# Altium PCB Glucometer-I.C.- Full V1.2.PcbDoc
Units mm, origin at the board's own origin, x right, y up, seen from the top; angles counter-clockwise.
Board outline 35.25 x 28.25 mm, 2 copper layers (Top Layer, Bottom Layer); 29 components, 30 nets, 125 pads, 12 vias.
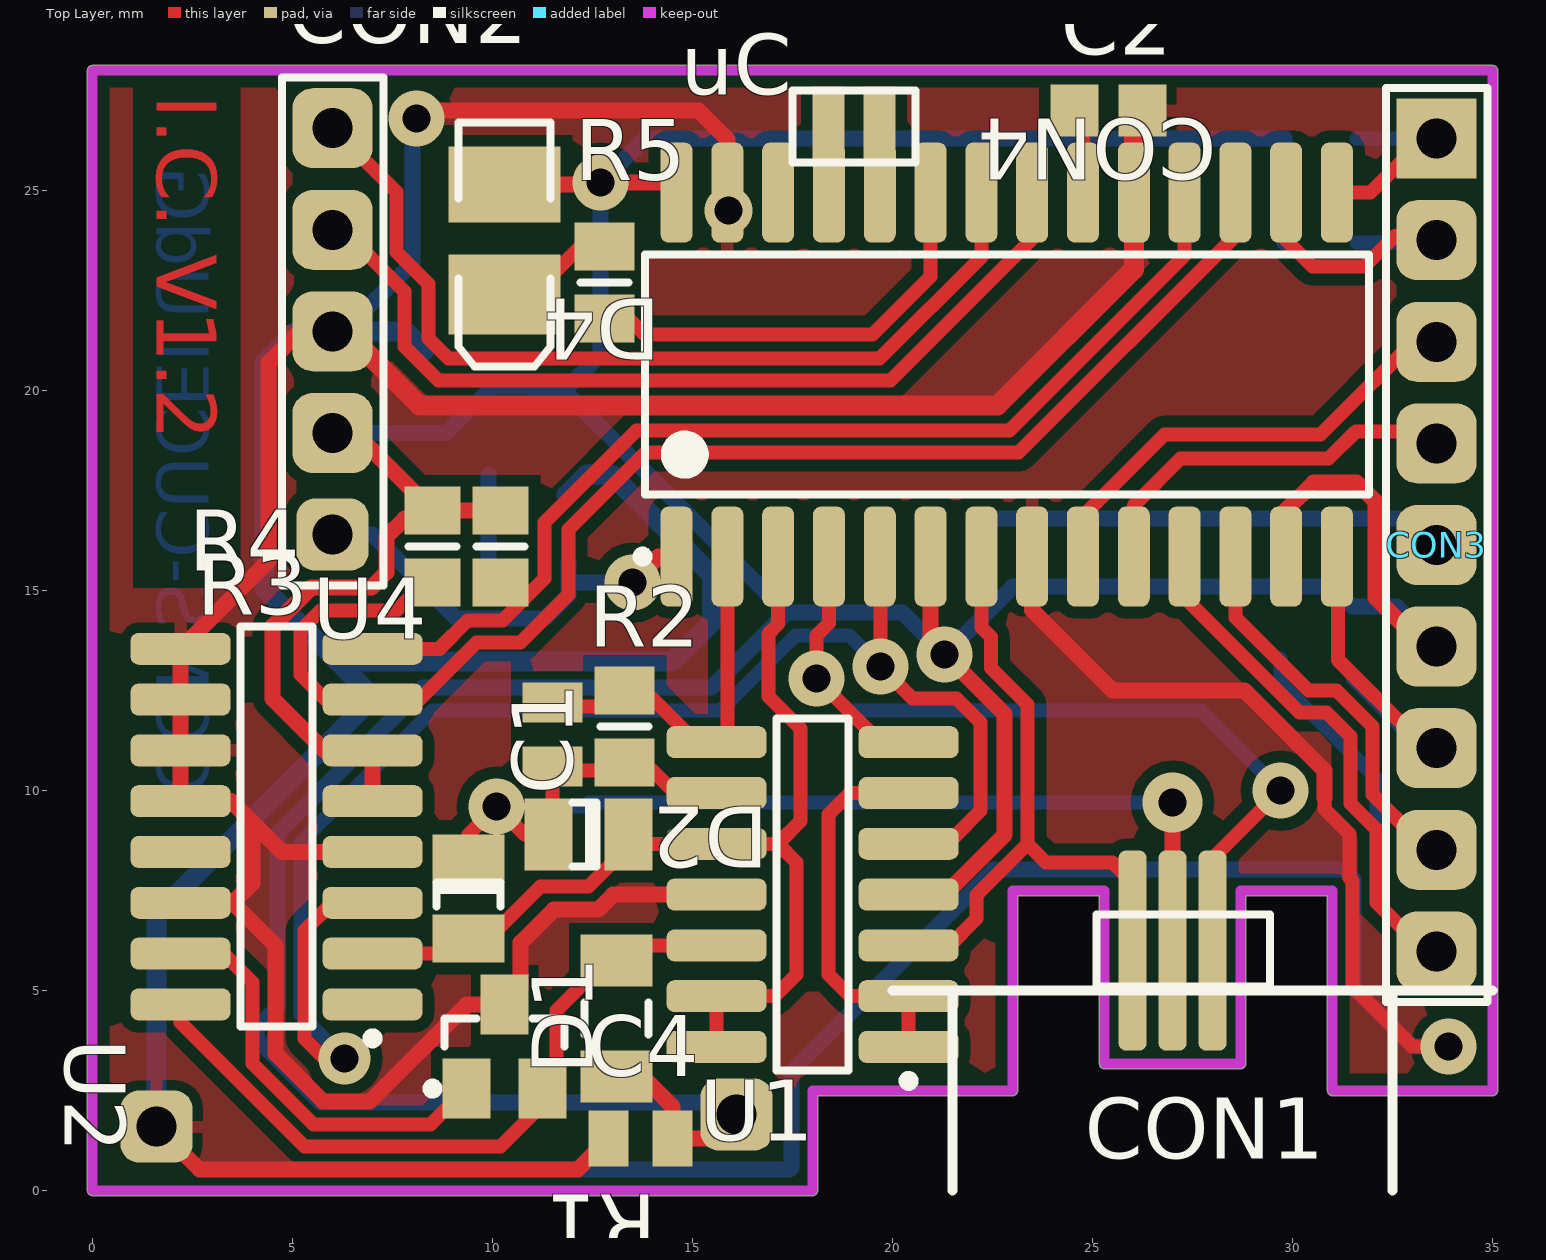
[diagram p0: Top Layer view]
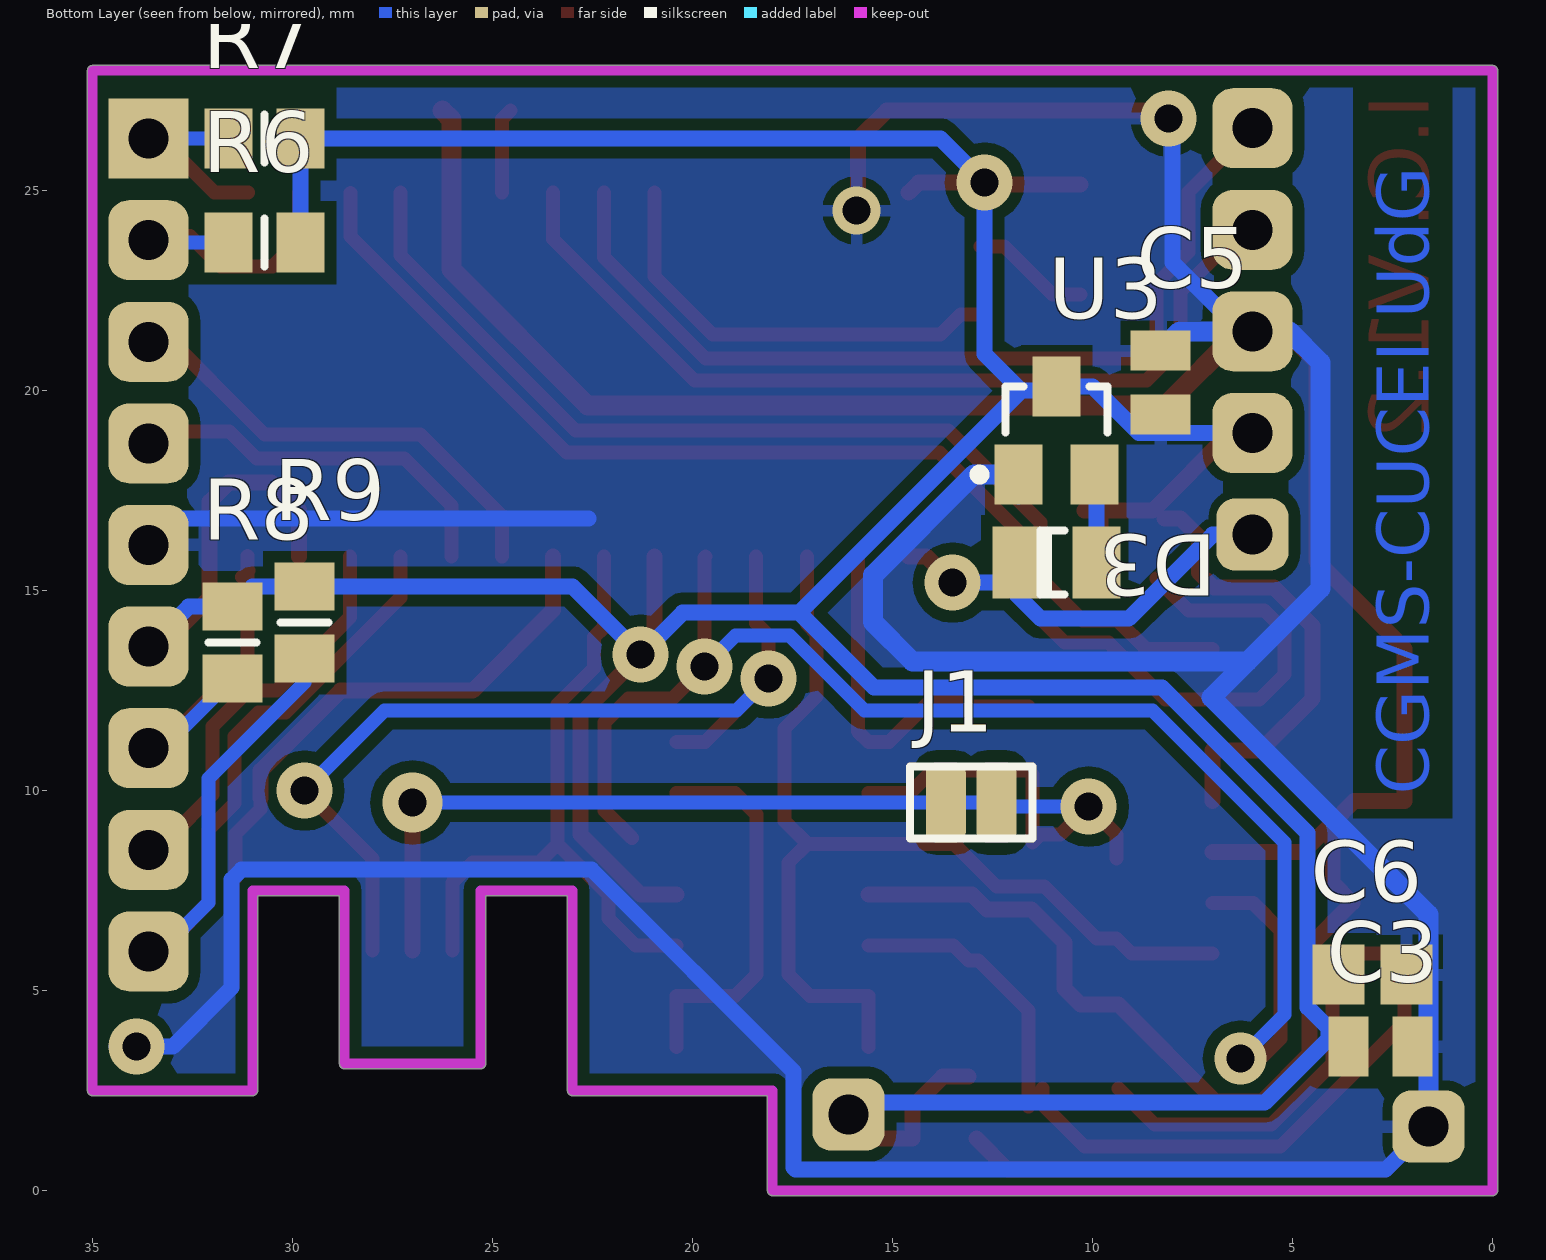
[diagram p1: Bottom Layer view, seen from below]

## Layer stack, top to bottom
Top Layer: signal copper 0.0356
Dielectric: dielectric 0.32, FR-4, Dk 4.8
Bottom Layer: signal copper 0.0356

## Board outline
-0.127,0 ccw(c0,0) 0,-0.127 18,-0.127 ccw(c18,0) 18.127,0 18.127,2.373 23,2.373 ccw(c23,2.5) 23.127,2.5 23.127,7.373 25.173,7.373 25.173,3.17 ccw(c25.3,3.17) 25.3,3.043 28.7,3.043 ccw(c28.7,3.17) 28.827,3.17 28.827,7.373 30.873,7.373 30.873,2.5 ccw(c31,2.5) 31,2.373 35,2.373 ccw(c35,2.5) 35.127,2.5 35.127,28 ccw(c35,28) 35,28.127 0,28.127 ccw(c0,28) -0.127,28

## Design rules (kind name [scope] priority, off if disabled: settings)
AssemblyTestPointUsage AssemblyTestPointUsage_1 [All] p2:
AssemblyTestpoint AssemblyTestpoint_1 [All] p2: testpointundercomponent=TRUE minsize=1.016 maxsize=2.54 preferedsize=1.524 minholesize=0 maxholesize=1.016 preferedholesize=0.813 testpointgrid=0.025 usegrid=TRUE gridtolerance=0 allowsidetop=TRUE allowsidebottom=TRUE
Clearance [All] p1: gap=0.2
ComponentClearance ComponentClearance_1 [All] p2: gap=0.254 collisioncheckmode=3 verticalgap=0.254 showdistances=FALSE
DiffPairsRouting DiffPairsRouting_1 [All] p2: maxlimit=0.254 minlimit=0.254 mostfreqgap=0.254 maxuncoupledlength=12.7
FabricationTestPointUsage TestPointUsage [All] p2: valid=0 allowmultiple=FALSE
FabricationTestpoint Testpoint [All] p2: side=3 testpointundercomponent=TRUE minsize=1.016 maxsize=2.54 preferedsize=1.524 minholesize=0 maxholesize=1.016 preferedholesize=0.813 testpointgrid=0.025 allowsidetop=TRUE allowsidebottom=TRUE usegrid=TRUE gridtolerance=0
FanoutControl Fanout_LCC [IsLCC] p1: bgadir=Out bgaviamode=Centered fanoutstyle=Auto fanoutdirection=Alternating viagrid=0.025 // Fanout_LCC (Default Rule)
FanoutControl Fanout_BGA [IsBGA] p2: bgadir=Out bgaviamode=Centered fanoutstyle=Auto fanoutdirection=Alternating viagrid=0.025 // Fanout_BGA (Default Rule)
FanoutControl Fanout_Default [All] p4: bgadir=Out bgaviamode=Centered fanoutstyle=Auto fanoutdirection=Alternating viagrid=0.025 // Fanout_Default (Default Rule)
FanoutControl Fanout_Small [(CompPinCount < 5)] p5: bgadir=Out bgaviamode=Centered fanoutstyle=Auto fanoutdirection=OutThenIn viagrid=0.025 // Fanout_Small (Default Rule)
FanoutControl Fanout_BGA_1 [IsBGA] p6: bgadir=Out bgaviamode=Centered fanoutstyle=Auto fanoutdirection=Alternating viagrid=0.025 // Fanout_BGA (Default Rule)
FanoutControl Fanout_LCC_1 [IsLCC] p7: bgadir=Out bgaviamode=Centered fanoutstyle=Auto fanoutdirection=Alternating viagrid=0.025 // Fanout_LCC (Default Rule)
FanoutControl Fanout_SOIC_1 [IsSOIC] p8: bgadir=Out bgaviamode=Centered fanoutstyle=Auto fanoutdirection=Alternating viagrid=0.025 // Fanout_SOIC (Default Rule)
FanoutControl Fanout_Small_1 [(CompPinCount < 5)] p9: bgadir=Out bgaviamode=Centered fanoutstyle=Auto fanoutdirection=OutThenIn viagrid=0.025 // Fanout_Small (Default Rule)
FanoutControl Fanout_Default_1 [All] p10: bgadir=Out bgaviamode=Centered fanoutstyle=Auto fanoutdirection=Alternating viagrid=0.025 // Fanout_Default (Default Rule)
Height Height_1 [All] p2: minheight=0 maxheight=25.4 prefheight=12.7
HoleSize [All] p1: absolutevalues=TRUE maxlimit=5 minlimit=0.025 maxpercent=80.000 minpercent=20.000
HoleSize HoleSize_1 [All] p2: absolutevalues=TRUE maxlimit=5 minlimit=0.025 maxpercent=80.000 minpercent=20.000
HoleToHoleClearance HoleToHoleClearance_1 [All] p2: gap=0.254 allowstackedmicrovias=TRUE
LayerPairs LayerPairs_1 [All] p2: enforce=TRUE
MinimumSolderMaskSliver MinimumSolderMaskSliver_1 [All] p2: minsoldermaskwidth=0.254
NetAntennae NetAntennae_1 [All] p2: netantennaetolerance=0
PasteMaskExpansion PasteMaskExpansion_1 [All] p2: expansion=0
PlaneClearance PlaneClearance_1 [All] p2: clearance=0.508
PlaneConnect [All] p1: planeconnectstyle=Relief reliefexpansion=0.508 reliefentries=4 reliefconductorwidth=0.3 reliefairgap=0.25
PolygonConnect [All] p1: connectstyle=Relief reliefconductorwidth=0.3 reliefentries=4 polygonreliefangle="90 Angle" airgapwidth=0.25
PolygonConnect PolygonConnect_1 [All] p2: connectstyle=Relief reliefconductorwidth=0.3 reliefentries=4 polygonreliefangle="90 Angle" airgapwidth=0.25
RoutingPriority RoutingPriority_1 [All] p2: routingpriority=0
RoutingTopology RoutingTopology_1 [All] p2: topology=Shortest
RoutingVias [All] p1: holewidth=0.7 width=1.5 viastyle="Through Hole" minholewidth=0.7 minwidth=1 maxholewidth=1 maxwidth=2
ShortCircuit ShortCircuit_1 [All] p2: allowed=FALSE
SilkToSilkClearance SilkToSilkClearance_1 [All] p2: silktosilkclearance=0.254
SilkToSolderMaskClearance SilkscreenOverComponentPads [IsPad] p2: minsilkscreentomaskgap=0.254 clearancetoexposedcopper=TRUE
SolderMaskExpansion [All] p1: expansion=0.102
SolderMaskExpansion SolderMaskExpansion_1 [All] p2: expansion=0.102
UnRoutedNet UnRoutedNet_1 [All] p2:
Width [All] p1: maxlimit=5 minlimit=0.25 preferedwidth=0.35 minimp=50.000000 maximp=50.000000 favimp=50.000000
22 further rules are at their usual default settings.

## Components (designator, comment, footprint, x,y, rotation, side; value= is the part's Value field where it differs from the comment)
C1 "Cap2" CAPC1608N#1 11.5,11.4 r90 top
C2 "Cap" CAPC2012N#1 25.4,27 r180 top
C3 "Cap" CAPC1608N#1 2.8,3.6 r0 bottom
C4 "Cap" CAPC1608N#2 13.7,1.3 r0 top
C5 "Cap" CAPC1608N#1 8.3,20.2 r270 bottom
C6 "Cap" CAPC2012N#2 3,5.4 r0 bottom
CON1 "MHDR1X3" MHDR1X3 26,6 r0 top
CON2 "Header 5" HDR1X5 6,16.4 r90 top
CON3 "Header 9" HDR1X9 33.6,26.3 r270 top
CON4 "MHDR1X2" MHDR1X2#1 18.4,26.6 r0 top
D1 "1N4148" CD3216-1206#1 9.4,7.4 r90 top
D2 "1N4148" CD3216-1206#2 12.3,8.9 r0 top
D3 "1N4148" CD3216-1206#1 11,15.7 r0 bottom
D4 "LED2" 3.2X1.6X1.1 10.3,23.8 r270 top
J1 "MHDR1X2" MHDR1X2#2 12.4,9.7 r0 bottom
R1 "Res1" RESC3216N 13.1,4.3 r270 top
R2 "Res1" RESC2012N#1 13.3,11.6 r270 top
R3 "Res1" RESC2012N#2 8.5,16.1 r270 top
R4 "Res1" RESC2012N#2 10.2,16.1 r270 top
R5 "Res1" RESC2012N#1 12.8,22.7 r90 top
R6 "Res1" RESC2012N#1 30.7,23.7 r0 bottom
R7 "Res1" RESC2012N#1 30.7,26.3 r0 bottom
R8 "Res1" RESC2012N#1 31.5,13.7 r270 bottom
R9 "Res1" RESC2012N#1 29.7,14.2 r270 bottom
U1 "LMC6044IN" M14A_N 18,7.4 r180 top
U2 "LM4041CEM3-ADJ/NOPB" MF03A_N 10.3,3.6 r90 top
U3 "Supply Voltage Supervisor" SOT23 10.9,19 r180 bottom
U4 "AD5242" R-16N_N 4.6,9.1 r180 top
uC "PIC24FJ64GA102-I/SO" SOIC-SO28_N 22.855,20.4 r90 top

## Footprints (in the part's own frame and the unit in brackets; to place one, negate y for a bottom-side part, rotate by r counter-clockwise, add the part's x,y. Pads: shape width x height; smd on the part's side, far side on the other; paste and mask are expansions set on the pad)
3.2X1.6X1.1 [mm] "SMT LED; 2 Flat Leads"
  rect 1.9x2.8 smd: 1(-1.35,0)
  rect 2x2.8 smd: 2(1.4,0)
  silkscreen extent -2.9,-1.15 3.2,1.15
CAPC1608N#1 [mm] "Chip Capacitor, Body 1.6x0.8mm, IPC Medium Density"
  rect 1x1.5 smd: 1(-0.8,0) 2(0.8,0)
  body extent -0.87,-0.48 0.87,0.48, height 0.85
CAPC1608N#2 [mm] "Chip Capacitor, Body 1.6x0.8mm, IPC Medium Density"
  rect 1x1.4 smd: 1(-0.8,0) 2(0.8,0)
  body extent -0.87,-0.48 0.87,0.48, height 0.85
CAPC2012N#1 [mm] "Chip Capacitor, Body 2.0x1.3mm, IPC Medium Density"
  rect 1.2x1.3 smd: 1(-0.85,0) 2(0.85,0)
  body extent -1.1,-0.72 1.1,0.72, height 1.1
CAPC2012N#2 [mm] "Chip Capacitor, Body 2.0x1.3mm, IPC Medium Density"
  rect 1.3x1.5 smd: 1(-0.85,0) 2(0.85,0)
  body extent -1.1,-0.72 1.1,0.72, height 1.1
CD3216-1206#1 [mm] "Chip Diode; Body 3.2 x 1.6 mm (LxW typ)"
  rect 1.2x1.8 smd: 1(-1.1,0) 2(0.9,0)
  silkscreen extent -0.3,-0.8 0.3,0.8
CD3216-1206#2 [mm] "Chip Diode; Body 3.2 x 1.6 mm (LxW typ)"
  rect 1.2x1.8 smd: 1(-0.9,0) 2(1.1,0)
  silkscreen extent -0.3,-0.8 0.3,0.8
HDR1X5 [mm] "Connector; Header; 5 Position"
  rrect50% 1.8x1.8 hole 1: 1(0,0)
  rrect50% 2x2 hole 1: 2(2.54,0) 3(5.08,0) 4(7.62,0) 5(10.16,0)
  silkscreen extent -1.27,-1.27 11.43,1.27
HDR1X9 [mm] "Connector; Header; 9 Position"
  rect 2x2 hole 1: 1(0,0)
  rrect50% 2x2 hole 1: 2(2.54,0) 3(5.08,0) 4(7.62,0) 5(10.16,0) 6(12.7,0) 7(15.24,0) 8(17.78,0) 9(20.32,0)
  silkscreen extent -1.27,-1.27 21.59,1.27
M14A_N [mm] "SOIC, 14-Leads, Body 8.6x3.9mm, Pitch 1.27mm, IPC Medium Density"
  rrect50% 2.5x0.8 smd: 1(-2.4,3.81) 2(-2.4,2.54) 3(-2.4,1.27) 4(-2.4,0) 5(-2.4,-1.27) 6(-2.4,-2.54) 7(-2.4,-3.81) 8(2.4,-3.81) 9(2.4,-2.54) 10(2.4,-1.27) 11(2.4,0) 12(2.4,1.27) 13(2.4,2.54) 14(2.4,3.81)
  silkscreen extent -2.53,-4.4 0.9,4.78, body extent -2,-4.38 2,4.38, height 1.75
MF03A_N [mm] "SOT23, 3-Leads, Body 2.9x1.3mm, Pitch 0.95mm, Lead Span 2.4mm, IPC Medium Density"
  rect 1.5x1.2 smd: 1(-1.05,0.95) 2(-1.05,-0.95) 3(1.05,0)
  silkscreen extent -1.17,-1.5 0.7,1.92, body extent -0.7,-1.5 0.7,1.5, height 1.12
MHDR1X2#1 [mm] "Connector; Header; 2 Position"
  rect 0.8x2 smd: 1(0,0) 2(1.27,0)
  silkscreen extent -0.9,-0.9 2.17,0.9
MHDR1X2#2 [mm] "Connector; Header; 2 Position"
  rrect50% 1x2 smd: 1(0,0) 2(1.27,0)
  silkscreen extent -0.9,-0.9 2.17,0.9
MHDR1X3 [mm] "Connector; Header; 3 Position"
  rrect50% 0.7x5 smd: 1(0,0) 2(1,0) 3(2,0)
  silkscreen extent -0.9,-0.9 3.44,0.9
R-16N_N [mm] "16-Pin Small Outline Integrated Circuit 1.27 mm Pitch, IPC Medium Density"
  rrect50% 2.5x0.8 smd: 1(-2.4,4.445) 2(-2.4,3.175) 3(-2.4,1.905) 4(-2.4,0.635) 5(-2.4,-0.635) 6(-2.4,-1.905) 7(-2.4,-3.175) 8(-2.4,-4.445) 9(2.4,-4.445) 10(2.4,-3.175) 11(2.4,-1.905) 12(2.4,-0.635) 13(2.4,0.635) 14(2.4,1.905) 15(2.4,3.175) 16(2.4,4.445)
  silkscreen extent -2.53,-5 0.9,5.42, body extent -1.95,-4.95 1.95,4.95, height 1.75
RESC2012N#1 [mm] "Chip Resistor, Body 2.0x1.3mm, IPC Medium Density"
  rect 1.2x1.5 smd: 1(-0.9,0) 2(0.9,0)
  silkscreen extent 0,-0.6 0,0.6, body extent -1.07,-0.7 1.07,0.7, height 0.65
RESC2012N#2 [mm] "Chip Resistor, Body 2.0x1.3mm, IPC Medium Density"
  rect 1.2x1.4 smd: 1(-0.9,0) 2(0.9,0)
  silkscreen extent 0,-0.6 0,0.6, body extent -1.07,-0.7 1.07,0.7, height 0.65
RESC3216N [mm] "Chip Resistor, Body 3.2x1.6mm, IPC Medium Density"
  rect 1.3x1.8 smd: 1(-1.45,0) 2(1.45,0)
  silkscreen extent -0.4,-0.8 0.4,0.8, body extent -1.68,-0.87 1.68,0.87, height 0.71
SOIC-SO28_N [mm] "SOIC, 28-Leads, Body 17.9x7.5mm, Pitch 1.27mm, IPC Medium Density"
  rrect50% 2.5x0.8 smd: 1(-4.55,8.255) 2(-4.55,6.985) 3(-4.55,5.715) 4(-4.55,4.445) 5(-4.55,3.175) 6(-4.55,1.905) 7(-4.55,0.635) 8(-4.55,-0.635) 9(-4.55,-1.905) 10(-4.55,-3.175) 11(-4.55,-4.445) 12(-4.55,-5.715) 13(-4.55,-6.985) 14(-4.55,-8.255) 15(4.55,-8.255) 16(4.55,-6.985) 17(4.55,-5.715) 18(4.55,-4.445) 19(4.55,-3.175) 20(4.55,-1.905) 21(4.55,-0.635) 22(4.55,0.635) 23(4.55,1.905) 24(4.55,3.175) 25(4.55,4.445) 26(4.55,5.715) 27(4.55,6.985) 28(4.55,8.255)
  silkscreen extent -4.67,-9.05 3,9.23, body extent -3.8,-9.06 3.8,9.06, height 2.65
SOT23 [mm] "SOT-23; 3 Leads; Body 3.0 x 2.6 mm, inc. leads (LxW max)"
  rect 1.2x1.5 smd: 1(-0.95,-1.1) 2(0.95,-1.1) 3(0,1.1)
  silkscreen extent -2.05,-1.22 1.28,1.1

## Part data
C1 C2 C3 C4 C5 C6: "Capacitor"
CON1: "Header, 3-Pin"
CON2: "Header, 5-Pin"
CON3: "Header, 9-Pin"
CON4 J1: "Header, 2-Pin"
D1 D2 D3: "High Conductance Fast Diode"
D4: "Typical RED, GREEN, YELLOW, AMBER GaAs LED"
R1 R2 R3 R4 R5 R6 R7 R8 R9: "Resistor"
U1: "CMOS Quad Micropower Operational Amplifier, 14-pin MDIP"
U2: "Precision Micropower Shunt Voltage Reference, 3-pin SOT-23, Pb-Free"
U4: "AD5242BR"
uC: "General purpose 16-bit Flash Microcontroller with nanoWatt XLP, 64KB Flash, 8KB SRAM, 28-Pin SOIC, Industrial Temperature"

## Free pads (board coordinates)
  rrect50% 1.8x1.8 hole 1: 0(16.1,1.9) 1(1.6,1.6)

## Via types
v1: diameter 1.4, hole 0.7, Top Layer to Bottom Layer, 8 vias
v2: diameter 1.2, hole 0.7, Top Layer to Bottom Layer, 1 vias
v3: diameter 1.4, hole 0.7, Top Layer to Bottom Layer, tented bottom, 1 vias
v4: diameter 1.3, hole 0.7, Top Layer to Bottom Layer, 1 vias
v5: diameter 1.5, hole 0.7, Top Layer to Bottom Layer, 1 vias

## Nets (pads, with @x,y where several pads share a name; then routed paths per layer and width w, separated by ;. In a path a pad name is that pad's centre, name@x,y a point inside that pad or via, vN(x,y) a via of type N, cw(c..) or ccw(c..) an arc to the next point about the centre after c; other vN are vias at no path point)
3.3V: C3.2 C4.2 C5.2 C6.2 CON2.2 CON3.6 D4.1 pad.0 R1.2 R3.1 R4.1 R6.1 R7.1 R8.1 R9.1 U1.4 U3.3 U4.5 U4.6 uC.6 uC.13 uC.28 | length 136.1
  Top Layer w0.4: CON2.2 6.56,18.94 R3.1 R4.1@9.8,17 ; U4.5 U4.6 5.795,11.005 4.5,12.3 4.5,14.113 5.462,15.075 6.969,15.075 7.345,15.451 7.345,16.345 7.8,16.8 R3.1@8.2,16.8 ; R4.1@9.8,16.6 R4.1@9.8,17 ; R4.1@9.8,17.3 R4.1@9.8,17 ; R4.1 R4.1@9.8,17 ; D4.1 v1@12.65,25.15 ; v1(12.7,25.2) 14.35,25.2 uC.28 ; R1.2 13.75,2.85 14.5,2.1 C4.2 15.5,1.3 pad.0 ; U1.4 21.3,7.4 22.8,8.9 22.8,11.913 21.313,13.4 v3(21.3,13.4) 20.95,13.75 uC.6 ; uC.13 29.84,17.015 30.525,17.7 31.6,17.7 32.075,17.225 32.075,14.825 33.3,13.6 CON3.6
  Bottom Layer w0.4: CON2.2 8.84,18.94 10,20.1 U3.3 ; U3.3@10.9,19.6 11.3,20 11.787,20 ; pad.0 15.8,2.2 5.7,2.2 4.1,3.8 4.1,4.056 4.625,4.581 4.625,8.938 8.262,12.575 15.462,12.575 17.337,14.45 ; R6.1 R7.1 13.8,26.3 v1(12.7,25.2) 12.7,20.913 11.787,20 ; CON3.6 32.6,14.6 R8.1 31,15.1 R9.1 23,15.1 v3(21.3,13.4) 20.25,14.45 17.337,14.45 ; 11.787,20 17.337,14.45
CNT: CON1.3 U1.7 uC.4 | length 23.6
  Top Layer w0.35: uC.4 18.41,14.19 18.1,13.88 v1(18.1,12.8) 19.69,11.21 U1.7 ; CON1.3 28,8.3 v1(29.7,10)
  Bottom Layer w0.35: v1(18.1,12.8) 18.9,12 27.7,12 v1(29.7,10)
CSCON: CON3.3 uC.9 | length 11.8
  Top Layer w0.35: uC.9 24.76,16.86 26.8,18.9 30.7,18.9 33.32,21.52 CON3.3@33.6,21.52
CSDATA: CON3.8 uC.12 | length 9.8
  Top Layer w0.35: uC.12 28.57,14.33 30.4,12.5 31.1,12.5 32,11.6 32,9.9 33.08,8.82 CON3.8@33.6,8.82
GND: C2.1 C3.1 C4.1 C5.1 C6.1 CON2.3 CON3.5 pad.1 U1.11 U2.3 U3.1 U4.4 U4.9 U4.10 U4.11 U4.12 U4.14 uC.8 uC.19 uC.27 | length 209.1
  Top Layer w0.35: 30.8,9.809 30.8,9.544 31.425,8.919 31.425,7.82 31.502,7.743 31.502,5.098 33,3.6 34.4,3.6 v1(33.9,3.6)
  Top Layer w0.4: pad.1 2.673,0.527 12.127,0.527 C4.1 ; CON2.3 5.18,21.48 4.4,20.7 4.4,15.745 U4.9 U4.10 U4.11 U4.12 3.465,9.735 4,9.2 ; U4.4 4.735,8.465 4,9.2 ; v1(8.1,26.8) 8.3,27 15.15,27 15.87,26.28 uC.27 uC.27@15.825,24.905 ; U1.11 13.013,7.4 12.638,7.025 11.525,7.025 10.7,6.2 10.7,5.05 U2.3 9.35,4.65 6.927,2.227 5.764,2.227 4.575,3.416 4.575,6.125 3.505,7.195 4,7.69 4,9.2 ; uC.8 23.49,14.51 25.5,12.5 28.8,12.5 30.8,10.5 30.8,9.809
  Top Layer w0.5: CON2.3@6.32,21.48 8.175,19.625 8.525,19.625 22.625,19.625 26.03,23.03 uC.19 26.03,26.78 C2.1
  Bottom Layer w0.4: pad.1 2.673,0.527 17.427,0.527 17.473,0.573 17.473,2.973 22.527,8.027 31.273,8.027 31.527,7.773 31.527,5.073 33,3.6 34.4,3.6 v1(33.9,3.6) ; CON2.3@6.28,21.48 8,23.2 8,26.5 v1@8.2,26.7 ; 22.6,16.8 33.24,16.8 CON3.5@33.6,16.44
  Bottom Layer w0.5: pad.1 1.6,6.9 7.025,12.325 4.3,15.05 4.3,20.7 5.08,21.48 CON2.3 6.28,21.48 7.82,21.48 C5.1 ; 6.125,13.225 14.5,13.225 15.484,14.209 15.484,15.384 12.968,17.9 12.35,17.9 U3.1@11.85,17.4
  other v2: 15.9,24.5
IRQ1: CON3.9 R9.2 uC.11 | length 22
  Top Layer w0.35: uC.11 27.3,14.822 30.172,11.95 30.85,11.95 31.45,11.35 31.45,9.672 32.1,9.022 32.1,7.2 33.02,6.28 CON3.9@33.6,6.28
  Bottom Layer w0.35: R9.2 29.7,12.7 32.102,10.298 32.102,7.198 33.32,5.98 CON3.9
LED1: R5.1 uC.23 | length 11.1
  Top Layer w0.35: R5.1@12.8,21.9 13.3,21.9 13.8,21.4 19.5,21.4 20.95,22.85 uC.23
MCLR: CON2.1 D3.2 uC.1 | length 10.8
  Top Layer w0.4: v1(13.5,15.2) 14.15,15.85 uC.1
  Bottom Layer w0.4: CON2.1 7,16.4 9.1,14.3 11.3,14.3 11.9,14.9 D3.2@11.9,15.2 ; D3.2 D3.2@11.9,15.2 ; v1(13.5,15.2) D3.2@11.9,15.2
NetC2_2: C2.2 uC.20 | length 2.1
  Top Layer w0.35: C2.2 24.76,26.79 uC.20
NetD3_1: D3.1 U3.2 | length 2.2
  Bottom Layer w0.4: D3.1 U3.2@9.9,17.9
NetD4_2: D4.2 R5.2 | length 3
  Top Layer w0.35: D4.2 11,22.4 12.2,23.6 R5.2
NetU1_1: U1.1 U1.2 U1.6 | length 9.7
  Top Layer w0.35: U1.1 U1.2 18.94,4.86 18.4,5.4 18.4,9.4 18.94,9.94 U1.6
NetuC_26: uC.26
PEGC2: CON2.5 uC.22 | length 22.9
  Top Layer w0.35: CON2.5 7.6,24.96 7.6,23.46 8.4,22.66 8.4,21.3 8.9,20.8 19.678,20.8 22.22,23.342 uC.22
PEGD2: CON2.4 uC.21 | length 22.4
  Top Layer w0.35: CON2.4@6.131,24.151 7.8,22.482 7.8,21.1 8.65,20.25 9.025,20.25 19.95,20.25 23.49,23.79 uC.21
REF: CON1.1 U1.3 uC.7 | length 16.8
  Top Layer w0.35: U1.3 21.43,6.13 22.1,6.8 22.1,7.387 23.375,8.662 ; uC.7 22.22,14.08 22.463,13.837 22.463,13.063 23.375,12.151 23.375,8.662 ; CON1.1 26,7.7 25.5,8.2 23.837,8.2 23.375,8.662
RESET: CON3.4 uC.10 | length 9.6
  Top Layer w0.35: uC.10 26.03,17.13 27.2,18.3 30.9,18.3 31.58,18.98 CON3.4@33.6,18.98
SCK: CON3.1 R7.2 uC.15 | length 4.9
  Top Layer w0.35: uC.15 31.95,24.95 CON3.1@33.4,26.4
  Bottom Layer w0.35: R7.2 CON3.1
SCL1: R3.2 U4.7 uC.17 | length 35.3
  Top Layer w0.35: R3.2@8.4,15.3 7.6,14.5 5.7,14.5 5.2,14 5.2,12.9 5.825,12.275 U4.7 8.175,12.275 9.6,13.7 10.7,13.7 11.9,14.9 11.9,16.522 13.828,18.45 23.15,18.45 28.555,23.855 uC.17@28.555,24.935
SDA1: R4.2 U4.8 uC.18 | length 26.8
  Top Layer w0.35: U4.8 8.667,13.545 9.372,14.25 10.25,14.25 11.3,15.3 11.3,16.7 13.6,19 22.922,19 27.3,23.378 uC.18
SDI: CON3.2 R6.2 uC.16 | length 7.6
  Top Layer w0.35: uC.16 29.84,23.76 30.5,23.1 31.8,23.1 32.56,23.86 CON3.2@33.4,23.86 ; CON3.2@33.45,23.91 CON3.2@33.6,24.06
  Bottom Layer w0.35: R6.2 33.54,23.7 CON3.2
SDO: CON3.7 R8.2 uC.14 | length 8.9
  Top Layer w0.35: uC.14@31.1,15.5 uC.14@31.26,15.34 ; uC.14@31.13,15.87 31.13,13.27 33.04,11.36 CON3.7@33.6,11.36
  Bottom Layer w0.35: R8.2 33.24,11.06 CON3.7
U1RX: CON4.2 uC.24
U1TX: CON4.1 uC.25
VCTRL: U1.5 U4.3 uC.5 | length 37.7
  Top Layer w0.35: v4(6.3,3.3) 5.8,3.3 5.3,3.8 5.3,6.5 5.995,7.195 U4.3 ; uC.5 19.7,15.83 v1(19.7,13.1) 20.5,12.3 21.6,12.3 22.2,11.7 22.2,9.5 U1.5@21.52,8.82
  Bottom Layer w0.35: v4(6.3,3.3) 5.2,4.4 5.2,8.7 8.5,12 15.7,12 17.575,13.875 18.925,13.875 v1(19.7,13.1)
VGND: D1.1 D2.2 U1.10 U1.13 U1.14 U4.2 uC.3 | length 26.3
  Top Layer w0.35: U4.2 9.025,5.925 D1.1 9.9,6.3 11.2,7.6 12.4,7.6 13.4,8.6 D2.2 ; D2.2@13.5,8.7 13.53,8.67 U1.10 17.13,8.67 ; U1.14 U1.13 17.06,4.86 17.6,5.4 17.6,8.2 17.13,8.67 ; uC.3 17.14,14.16 16.9,13.92 16.9,12.349 17.7,11.549 17.7,9.24 17.13,8.67
VOUT: C1.2 R2.1 U1.8 uC.2 | length 9.3
  Top Layer w0.35: C1.2@11.6,12.1 13.1,12.1 13.3,12.3 14,12.3 15.09,11.21 U1.8 15.87,11.48 uC.2
VREFH: R1.1 U1.12 U2.2 U4.16 | length 18.7
  Top Layer w0.35: U4.16 2.2,4.2 5.298,1.102 10.202,1.102 11.25,2.15 U2.2 ; U2.2@11.6,2.1 11.6,4.5 12.85,5.75 R1.1 13.48,6.13 U1.12
VREFW: U2.1 U4.15 | length 10.5
  Top Layer w0.35: U4.15 3.275,5.925 4,5.2 4,3.178 5.526,1.652 8.452,1.652 U2.1
WRK: C1.1 CON1.2 D1.2 D2.1 J1.1 J1.2 R2.2 U1.9 | length 30.2
  Top Layer w0.35: D1.2 9.4,8.9 v1(10.1,9.6) 10.8,8.9 D2.1@11.3,8.9 ; D2.1 D2.1@11.3,8.9 ; U1.9 14.56,9.94 14,10.5 11.6,10.5 11.5,10.4 11.5,8.7 D2.1@11.3,8.9
  Top Layer w0.4: CON1.2 v5(27,9.7)
  Bottom Layer w0.35: v1(10.1,9.6) 12.3,9.6 J1.1 J1.2 v5(27,9.7)
pads on no net: U4.1 U4.13

## Polygon pours and split planes (outlines as drawn)
GND on Bottom Layer "Bottom Layer-No Net" (solid, pour order 5): 0,28 0,0 18,0 18,2.5 23,2.5 23,7.5 25.3,7.5 25.3,3.17 28.7,3.17 28.7,7.5 31,7.5 31,2.5 35,2.5 35,28
3.3V on Bottom Layer "Bottom Layer-No Net" (solid, pour order 10): 5.5,20 9.5,20 9.5,14.5 8.8,14.5 5.5,17.8
GND on Top Layer "Bottom Layer-No Net" (solid, pour order 7): 0,28 0,0 18,0 18,2.5 23,2.5 23,7.5 25.3,7.5 25.3,3.17 28.7,3.17 28.7,7.5 31,7.5 31,2.5 35,2.5 35,28

## Keep-outs
Keep-Out Layer:
  lines w0.254: 0,0 0,13.6 0,28 35,28 35,2.5 31,2.5 31,7.5 28.7,7.5 28.7,3.17 25.3,3.17 25.3,7.5 23,7.5 23,2.5 18,2.5 18,0 0,0

## Other copper
Top Layer:
  text "I.C. V1.2" at 1.6,27.4 h1.5 r270
Bottom Layer:
  text "CGMS-CUCEI UdG" at 1.6,9.9 h1.3 r270

## Silkscreen, mask and mechanical layers (free items; w line width, h text height)
Top Overlay:
  lines w0.254: 20,5 35,5 ; 21.5,0 21.5,5 ; 32.5,0 32.5,5
Mechanical 16:
  lines w0.127: -135.175,-31.975 -130.095,-31.975 ; -135.175,22 -130.095,22 ; -135.175,75.975 -130.095,75.975 ; -65.325,-85.95 -65.325,-80.87 ; -65.325,124.87 -65.325,129.95 ; 4.525,-85.95 4.525,-80.87 ; 4.525,124.87 4.525,129.95 ; 74.375,-85.95 74.375,-80.87 ; 74.375,124.87 74.375,129.95 ; 139.145,-31.975 144.225,-31.975 ; 139.145,22 144.225,22 ; 139.145,75.975 144.225,75.975 ; -135.175,-85.95 -135.175,129.95 144.225,129.95 144.225,-85.95 -135.175,-85.95 ; -130.095,-80.87 139.145,-80.87 139.145,124.87 -130.095,124.87 -130.095,-80.87
  text "1" at -100.851,126.521 h1.78
  text "2" at -30.984,126.521 h1.78
  text "3" at 38.739,126.521 h1.78
  text "4" at 108.614,126.521 h1.78
  text "A" at -133.27,100.664 h1.78
  text "A" at 141.05,100.664 h1.78
  text "B" at 141.425,49.35 h1.78
  text "B" at -133.27,46.689 h1.78
  text "C" at -133.27,-7.286 h1.78
  text "C" at 141.05,-7.286 h1.78
  text "D" at -133.27,-61.134 h1.78
  text "D" at 141.05,-61.134 h1.78
  text "1" at -100.851,-84.299 h1.78
  text "2" at -30.984,-84.299 h1.78
  text "3" at 38.739,-84.299 h1.78
  text "4" at 108.614,-84.299 h1.78

## Dimensions
38.2,28 to 18,0 on Top Overlay
0,0 to 35,2.5 on Top Overlay